# Altium PCB LTC68xx.PcbDoc
Units mm, origin at the board's own origin, x right, y up, seen from the top; angles counter-clockwise.
Board outline 50 x 50 mm, 2 copper layers (Top Layer, Bottom Layer); 46 components, 57 nets, 160 pads, 12 vias.
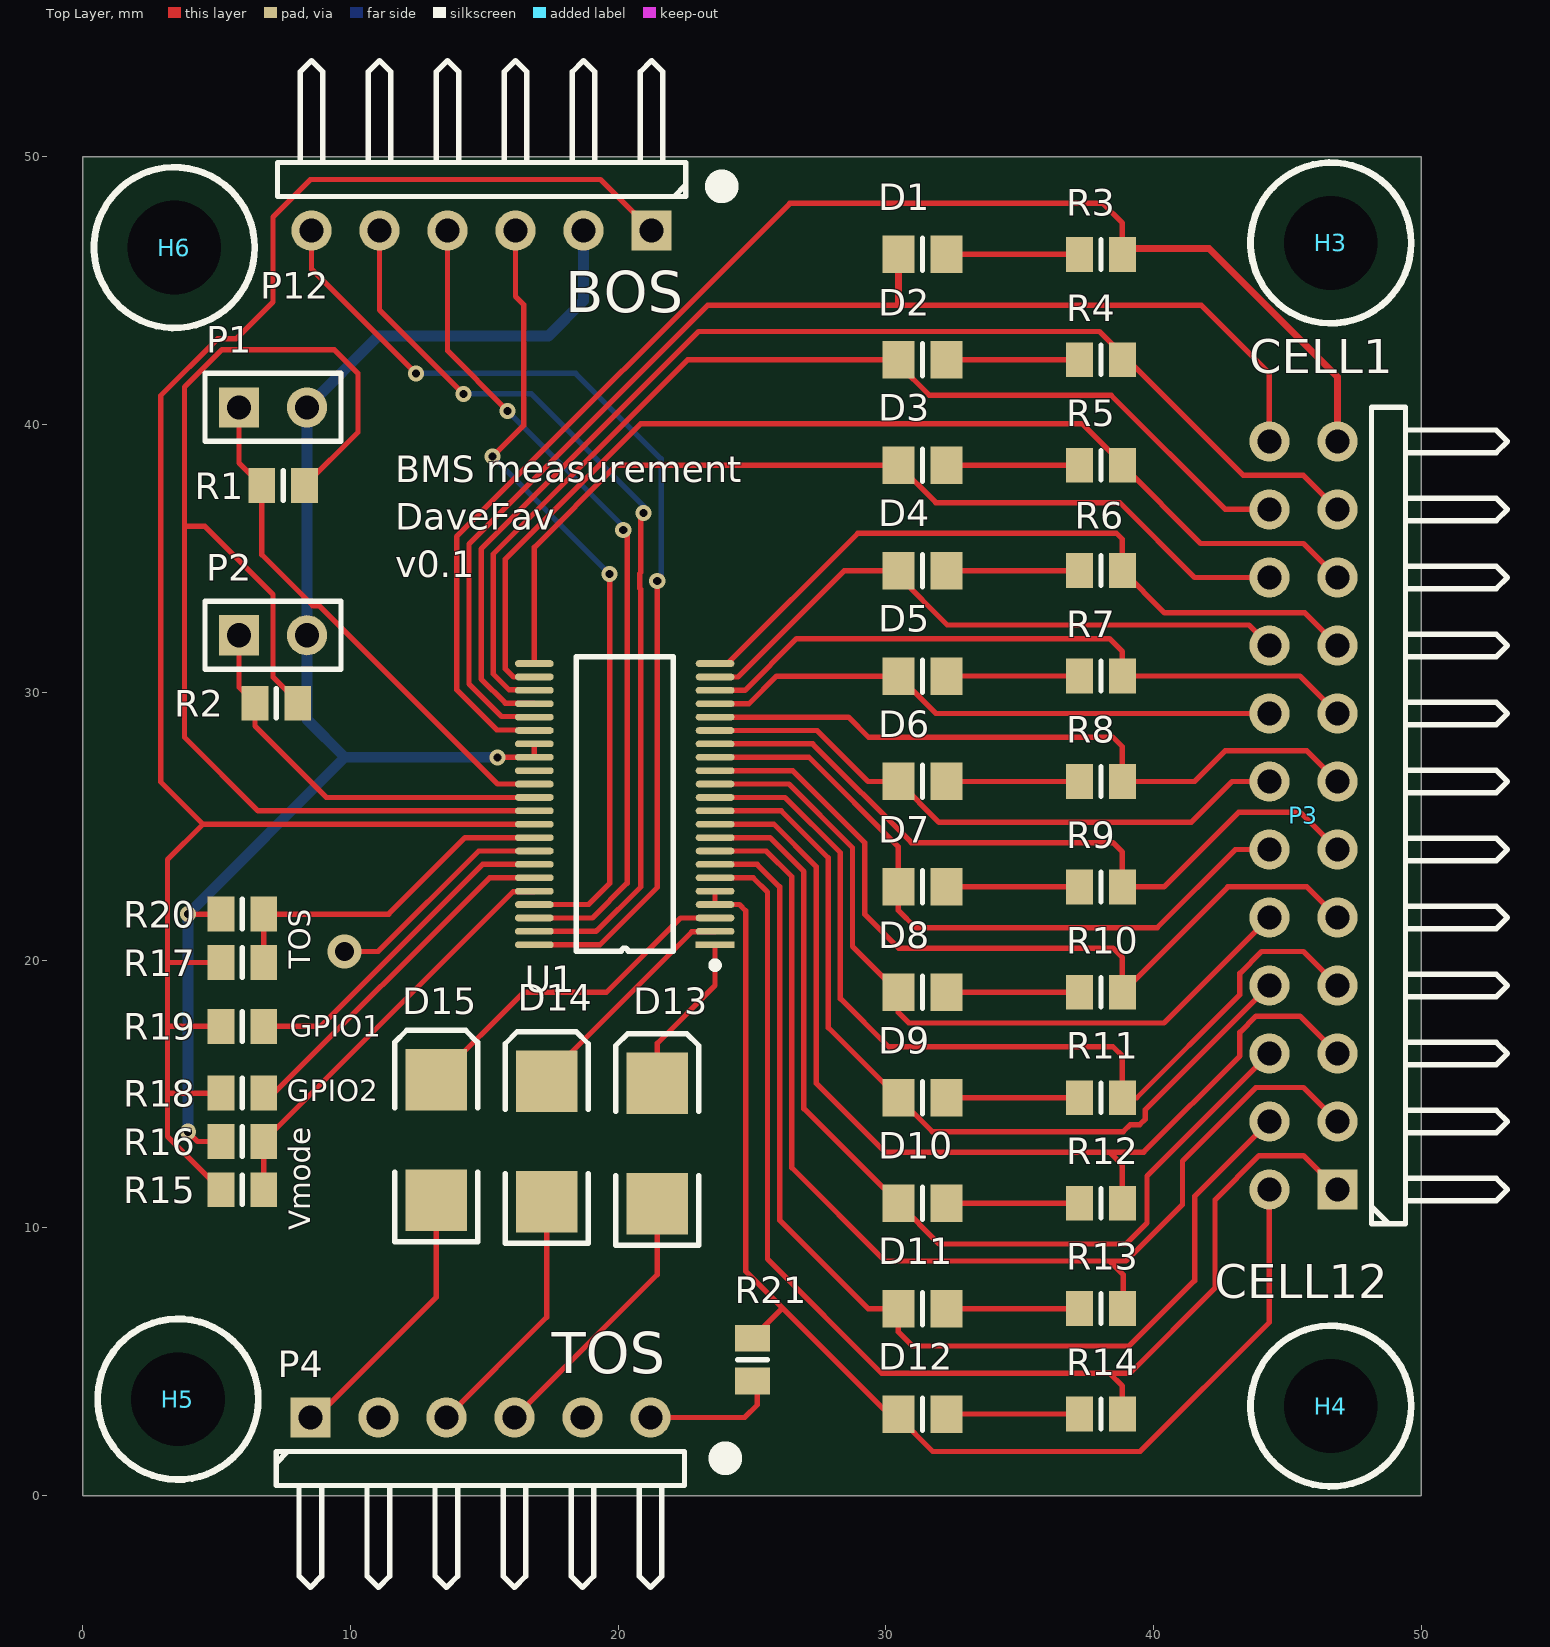
[diagram p0: Top Layer view]
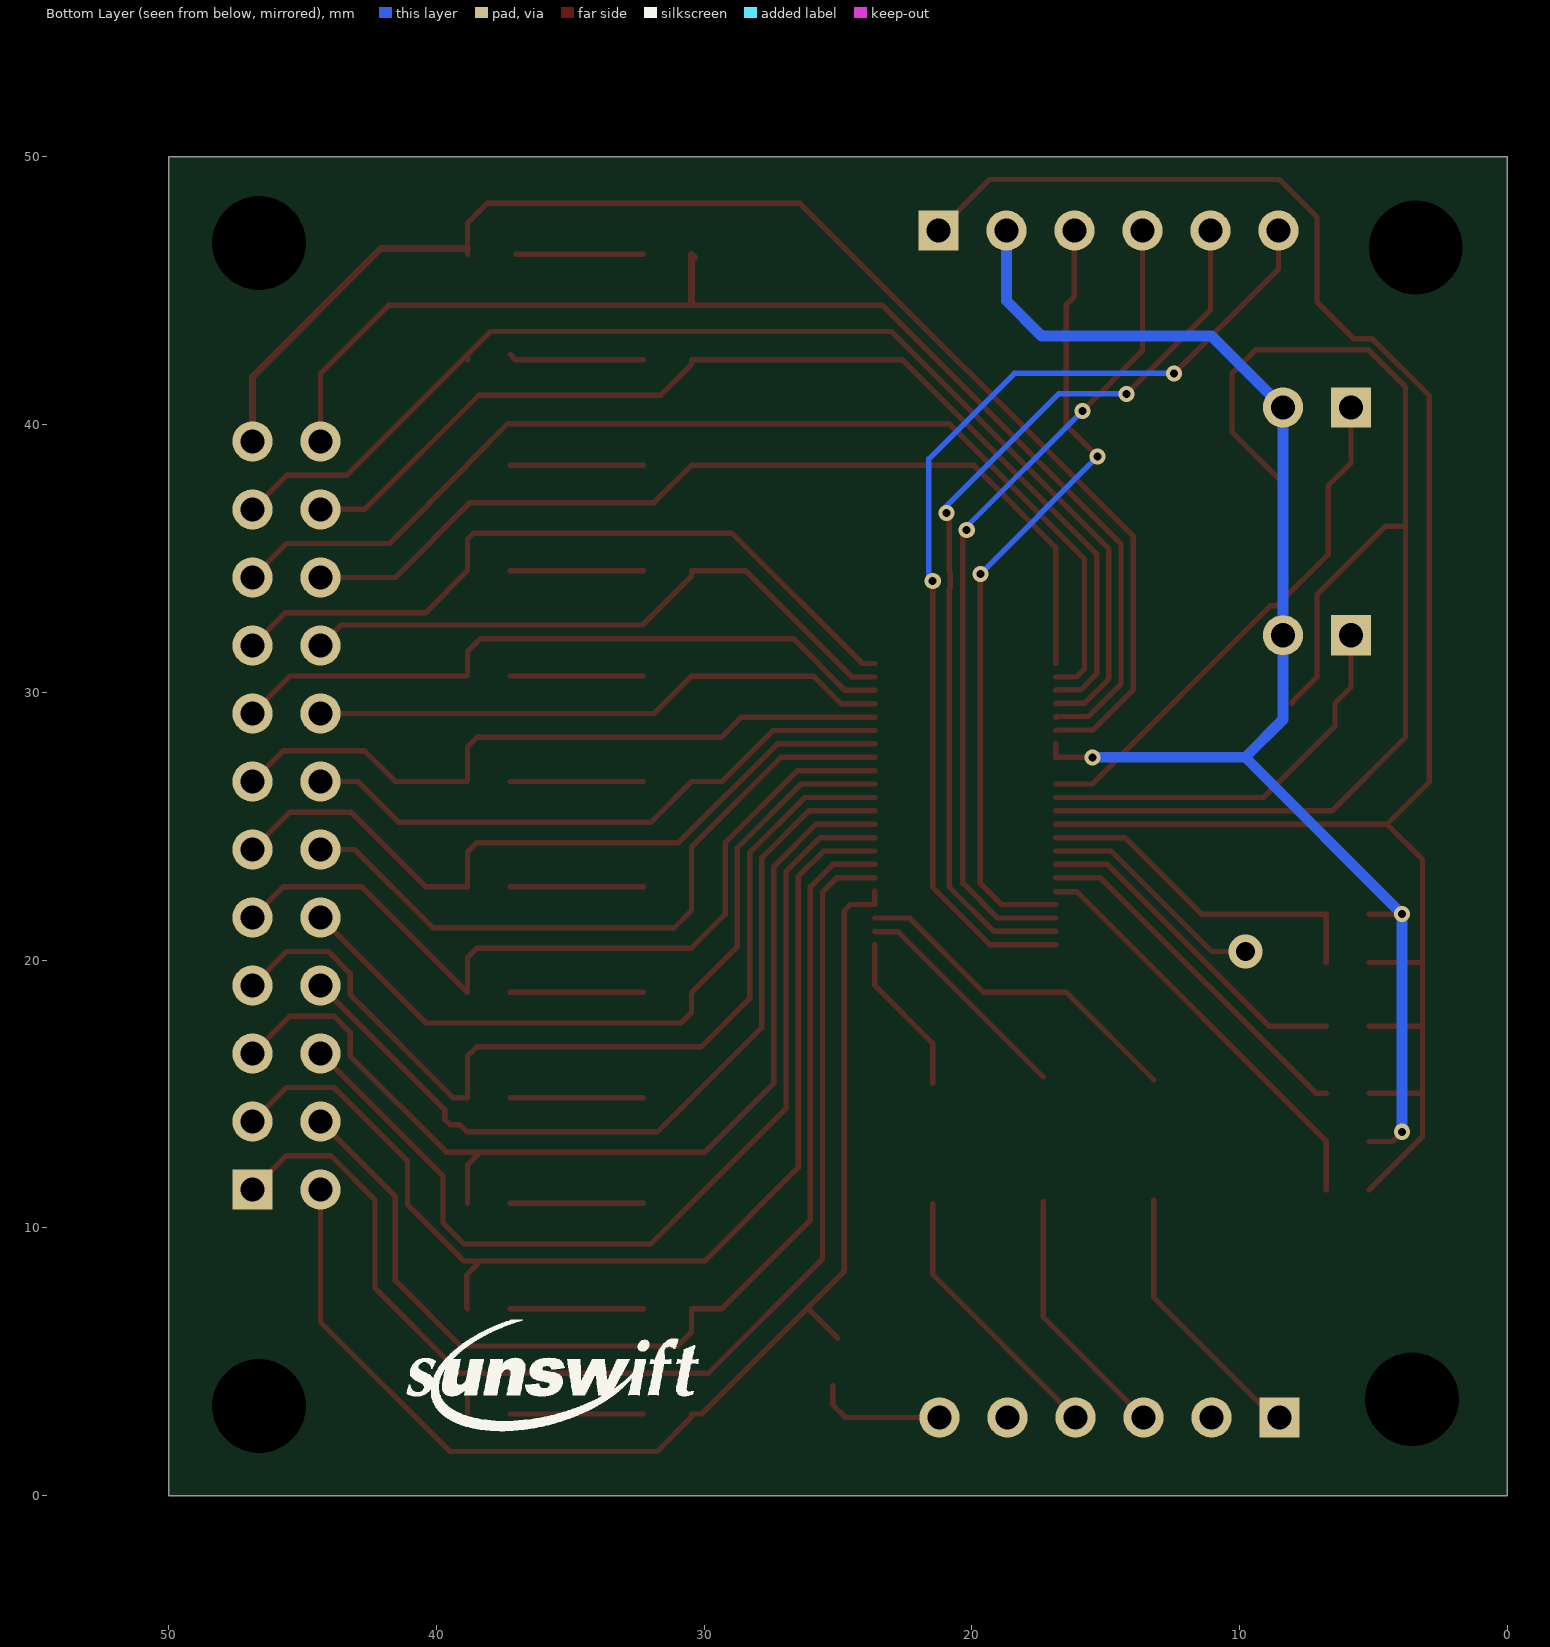
[diagram p1: Bottom Layer view, seen from below]

## Layer stack, top to bottom
Top Layer: signal copper 0.0356
Dielectric: dielectric 0.32, FR-4, Dk 4.8
Bottom Layer: signal copper 0.0356

## Board outline
0,0 50,0 50,50 0,50

## Design rules (kind name [scope] priority, off if disabled: settings)
Clearance [All] p1: gap=0.2
MinimumSolderMaskSliver [All] p1: minsoldermaskwidth=0.01
PolygonConnect [All] p1: connectstyle=Relief reliefconductorwidth=0.254 reliefentries=4 polygonreliefangle="90 Angle"
RoomDefinition LTC6803-3 [InComponentClass('LTC6803-3')] p1: confinementstyle=ConfineIn formatcopy=TRUE lockcomponents=FALSE outline 58.039,55.245 -6.096,55.245 -6.096,-5.461 58.039,-5.461
RoutingVias [All] p1: holewidth=0.711 width=1.27 viastyle="Through Hole" minholewidth=0.2 minwidth=0.4 maxholewidth=0.3 maxwidth=0.6
SilkscreenOverComponentPads [All] p1: minsilkscreentomaskgap=0.01
SolderMaskExpansion [All] p1: expansion=0.102
Width [All] p1: maxlimit=1 minlimit=0.2 preferedwidth=0.2
26 further rules are at their usual default settings.

## Classes and differential pairs
component class LTC6803-3: D1 D2 D3 D4 D5 D6 D7 D8 D9 D10 D11 D12 D13 D14 D15 P1 P2 P3 P4 P12 R1 R2 R3 R4 R5 R6 R7 R8 R9 R10 R11 R12 R13 R14 R15 R16 R17 R18 R19 R20 R21 U1
net class C_[12..0]: C_0 C_1 C_2 C_3 C_4 C_5 C_6 C_7 C_8 C_9 C_10 C_11 C_12
net class S_[12..1]: S_1 S_2 S_3 S_4 S_5 S_6 S_7 S_8 S_9 S_10 S_11 S_12

## Components (designator, comment, footprint, x,y, rotation, side; value= is the part's Value field where it differs from the comment)
D1 "LED2" 6-0805_N 31.369,46.355 r0 top
D2 "LED2" 6-0805_N 31.369,42.418 r0 top
D3 "LED2" 6-0805_N 31.369,38.481 r0 top
D4 "LED2" 6-0805_N 31.369,34.544 r0 top
D5 "LED2" 6-0805_N 31.369,30.607 r0 top
D6 "LED2" 6-0805_N 31.369,26.67 r0 top
D7 "LED2" 6-0805_N 31.369,22.733 r0 top
D8 "LED2" 6-0805_N 31.369,18.796 r0 top
D9 "LED2" 6-0805_N 31.369,14.859 r0 top
D10 "LED2" 6-0805_N 31.369,10.922 r0 top
D11 "LED2" 6-0805_N 31.369,6.985 r0 top
D12 "LED2" 6-0805_N 31.369,3.048 r0 top
D13 "D Schottky" SMB 21.463,13.154 r90 top
D14 "D Schottky" SMB 17.335,13.227 r90 top
D15 "D Schottky" SMB 13.208,13.281 r90 top
H3 "HOLE" M2.5 46.618,46.781 r0 top
H4 "HOLE" M2.5 46.618,3.347 r0 top (schematic designator H3)
H5 "HOLE" M2.5 3.565,3.601 r0 top (schematic designator H3)
H6 "HOLE" M2.5 3.429,46.609 r0 top (schematic designator H3)
P1 "Header 2" HDR1X2 5.842,40.64 r0 top
P2 "Header 2" HDR1X2 5.842,32.131 r0 top
P3 "Header 12X2H" HDR2X12H 46.863,11.43 r90 top
P4 "Header 6H" HDR1X6H 8.509,2.921 r0 top
P12 "Header 6H" HDR1X6H 21.251,47.244 r180 top
R1 "Res Semi" 6-0805_L 7.493,37.719 r0 top
R2 "Res Semi" 6-0805_L 7.239,29.591 r0 top
R3 "Res Semi" 6-0805_L 38.034,46.355 r0 top
R4 "Res Semi" 6-0805_L 38.034,42.418 r0 top
R5 "Res Semi" 6-0805_L 38.034,38.481 r0 top
R6 "Res Semi" 6-0805_L 38.034,34.544 r0 top
R7 "Res Semi" 6-0805_L 38.034,30.607 r0 top
R8 "Res Semi" 6-0805_L 38.034,26.67 r0 top
R9 "Res Semi" 6-0805_L 38.034,22.733 r0 top
R10 "Res Semi" 6-0805_L 38.034,18.796 r0 top
R11 "Res Semi" 6-0805_L 38.034,14.859 r0 top
R12 "Res Semi" 6-0805_L 38.034,10.922 r0 top
R13 "Res Semi" 6-0805_L 38.034,6.985 r0 top
R14 "Res Semi" 6-0805_L 38.034,3.048 r0 top
R15 "Res Semi" 6-0805_L 5.969,11.422 r180 top
R16 "Res Semi" 6-0805_L 5.969,13.227 r0 top
R17 "Res Semi" 6-0805_L 5.969,19.912 r180 top
R18 "Res Semi" 6-0805_L 5.969,15.032 r180 top
R19 "Res Semi" 6-0805_L 5.969,17.526 r180 top
R20 "Res Semi" 6-0805_L 5.969,21.717 r0 top
R21 "Res Semi" 6-0805_L 25.019,5.08 r90 top
U1 "LTC6803-3" SOP44 23.622,20.574 r180 top

## Footprints (in the part's own frame and the unit in brackets; to place one, negate y for a bottom-side part, rotate by r counter-clockwise, add the part's x,y. Pads: shape width x height; smd on the part's side, far side on the other; paste and mask are expansions set on the pad)
6-0805_L [mm] "Chip Resistor, Body 2.0x1.2mm, IPC High Density"
  rect 1x1.3 smd: 1(-0.8,0) 2(0.8,0)
  silkscreen extent 0,-0.55 0,0.55, body extent -1.07,-0.7 1.07,0.7, height 0.7
6-0805_N [mm] "Chip Resistor, Body 2.0x1.2mm, IPC Medium Density"
  rect 1.2x1.4 smd: 1(-0.9,0) 2(0.9,0)
  silkscreen extent 0,-0.6 0,0.6, body extent -1.07,-0.7 1.07,0.7, height 0.7
HDR1X2 [mm] "Connector; Header; 2 Position"
  rect 1.5x1.5 hole 0.9: 1(0,0)
  round 1.5 hole 0.9: 2(2.54,0)
  silkscreen extent -1.27,-1.27 3.81,1.27
HDR1X6H [mm] "Connector; Header; 6 Position; Right Angle"
  rect 1.5x1.5 hole 0.9: 1(0,0)
  round 1.5 hole 0.9: 2(2.54,0) 3(5.08,0) 4(7.62,0) 5(10.16,0) 6(12.7,0)
  silkscreen extent -1.27,-6.35 13.97,-1.27
HDR2X12H [mm] "Connector; Header; 12x2 Position; Right Angle"
  rect 1.5x1.5 hole 0.9: 1(0,0)
  round 1.5 hole 0.9: 2(0,2.54) 3(2.54,0) 4(2.54,2.54) 5(5.08,0) 6(5.08,2.54) 7(7.62,0) 8(7.62,2.54) 9(10.16,0) 10(10.16,2.54) 11(12.7,0) 12(12.7,2.54) 13(15.24,0) 14(15.24,2.54) 15(17.78,0) 16(17.78,2.54) 17(20.32,0) 18(20.32,2.54) 19(22.86,0) 20(22.86,2.54) 21(25.4,0) 22(25.4,2.54) 23(27.94,0) 24(27.94,2.54)
  silkscreen extent -1.27,-6.35 29.21,-1.27
M2.5 [mm]
  round 0 hole 3.5: 1(0,0)
  silkscreen extent -3,-3 3,3
SMB [mm] "DO-214-AA/SMB; 2 C-Bend Leads; Body 5.3 x 3.6 mm, inc. leads (LxW)"
  rect 2.3x2.3 smd: 1(-2.25,0) 2(2.25,0)
  silkscreen extent -3.8,-1.55 4.1,1.55
SOP44 [mm]
  rect 1.45x0.25 smd: 1(0,0)
  oval 1.45x0.25 smd: 2(0,-0.5) 3(0,-1) 4(0,-1.5) 5(0,-2) 6(0,-2.5) 7(0,-3) 8(0,-3.5) 9(0,-4) 10(0,-4.5) 11(0,-5) 12(0,-5.5) 13(0,-6) 14(0,-6.5) 15(0,-7) 16(0,-7.5) 17(0,-8) 18(0,-8.5) 19(0,-9) 20(0,-9.5) 21(0,-10) 22(0,-10.5) 23(6.75,-10.5) 24(6.75,-10) 25(6.75,-9.5) 26(6.75,-9) 27(6.75,-8.5) 28(6.75,-8) 29(6.75,-7.5) 30(6.75,-7) 31(6.75,-6.5) 32(6.75,-6) 33(6.75,-5.5) 34(6.75,-5) 35(6.75,-4.5) 36(6.75,-4) 37(6.75,-3.5) 38(6.75,-3) 39(6.75,-2.5) 40(6.75,-2) 41(6.75,-1.5) 42(6.75,-1) 43(6.75,-0.5) 44(6.75,0)
  silkscreen extent 1.56,-10.75 5.19,0.25

## Part data
D1 D2 D3 D4 D5 D6 D7 D8 D9 D10 D11 D12: "Typical RED, GREEN, YELLOW, AMBER GaAs LED"
D13 D14 D15: "Schottky Diode"
H3 H4 H5 H6: "Hole"
P1 P2: "Header, 2-Pin"
P3: "Header, 12-Pin, Dual row, Right Angle"
P4 P12: "Header, 6-Pin, Right Angle"
R1 R2 R3 R4 R5 R6 R7 R8 R9 R10 R11 R12 R13 R14 R15 R16 R17 R18 R19 R20 R21: "Semiconductor Resistor"

## Via types
v1: diameter 0.6, hole 0.3, Top Layer to Bottom Layer, 11 vias
v2: diameter 1.27, hole 0.711, Top Layer to Bottom Layer, 1 vias

## Nets (pads, with @x,y where several pads share a name; then routed paths per layer and width w, separated by ;. In a path a pad name is that pad's centre, name@x,y a point inside that pad or via, vN(x,y) a via of type N, cw(c..) or ccw(c..) an arc to the next point about the centre after c; other vN are vias at no path point)
C_0: P1.2 P2.2 P12.2 R16.1 R20.1 U1.29 U1.30 | length 54.9
  Top Layer w0.2: v1(3.937,13.589) 4.299,13.227 R16.1 ; v1(3.937,21.717) R20.1 ; v1(15.494,27.559) 15.509,27.574 U1.30 U1.29
  Bottom Layer w0.4: v1(3.937,13.589) v1(3.937,21.717) 9.794,27.574 ; v1(15.494,27.559) 15.479,27.574 9.794,27.574 ; P12.2 18.711,44.619 17.399,43.307 11.049,43.307 P1.2 P2.2 8.382,28.986 9.794,27.574
C_1: D1.1 P3.24 U1.27 | length 47.4
  Top Layer w0.2: U1.27 16.851,29.095 15.647,29.095 14.431,30.311 14.431,35.541 23.34,44.45 41.783,44.45 44.323,41.91 P3.24
  Top Layer w0.254: D1.1@30.353,46.239 D1.1 30.469,44.461
C_2: D2.1 P3.22 U1.25 | length 40.7
  Top Layer w0.2: U1.25 16.851,30.095 15.932,30.095 15.339,30.688 15.339,35.165 22.592,42.418 D2.1 30.469,42.248 31.623,41.094 38.415,41.094 42.679,36.83 P3.22
C_3: D3.1 P3.20 U1.23 | length 34.8
  Top Layer w0.2: U1.23 16.872,35.414 19.939,38.481 D3.1 31.865,37.084 38.735,37.084 41.529,34.29 P3.20
C_4: D4.1 P3.18 U1.21 | length 23.6
  Top Layer w0.2: U1.21 24.478,30.574 28.448,34.544 D4.1 30.469,34.336 32.293,32.512 43.561,32.512 P3.18
C_5: D5.1 P3.16 U1.19 | length 21.7
  Top Layer w0.2: U1.19 24.882,29.574 25.914,30.606 D5.1 31.865,29.21 P3.16
C_6: D6.1 P3.14 U1.17 | length 22.8
  Top Layer w0.2: U1.17 27.433,28.574 29.338,26.669 D6.1 31.992,25.146 41.402,25.146 42.926,26.67 P3.14
C_7: D7.1 P3.12 U1.15 | length 25.9
  Top Layer w0.2: U1.15 27.122,27.574 30.469,24.227 D7.1 30.469,21.855 31.115,21.209 40.132,21.209 43.053,24.13 P3.12
C_8: D8.1 P3.10 U1.13 | length 28.6
  Top Layer w0.2: U1.13 26.378,26.574 28.756,24.196 28.756,20.509 D8.1 30.469,18.045 30.861,17.653 40.386,17.653 P3.10
C_9: D9.1 P3.8 U1.11 | length 31.8
  Top Layer w0.2: U1.11 26.094,25.574 27.848,23.82 27.848,17.48 D9.1 31.738,13.589 38.862,13.589 39.128,13.855 39.481,13.855 39.688,14.062 39.688,14.415 P3.8
C_10: D10.1 P3.6 U1.9 | length 36.1
  Top Layer w0.2: U1.9 25.673,24.574 26.94,23.307 26.94,14.451 D10.1 31.992,9.398 38.961,9.398 39.751,10.188 39.751,11.938 P3.6
C_11: D11.1 P3.4 U1.7 | length 41.3
  Top Layer w0.2: U1.7 25.191,23.574 26.032,22.733 26.032,10.29 29.337,6.985 D11.1 30.469,6.11 30.991,5.588 39.088,5.588 41.529,8.029 41.529,11.176 P3.4
C_12: D12.1 P3.2 R21.2 U1.4 U1.5 | length 46.1
  Top Layer w0.2: U1.5 U1.4 24.535,22.074 24.765,21.844 24.765,8.382 30.099,3.048 D12.1 30.469,2.932 31.75,1.651 39.497,1.651 44.323,6.477 P3.2 ; R21.2 26.124,6.985
CSBI: P12.6 U1.44 | length 39
  Top Layer w0.2: P12.6 8.551,45.805 v1(12.446,41.91) ; U1.44 19.325,20.574 21.463,22.712 v1(21.463,34.163)
  Bottom Layer w0.2: v1(12.446,41.91) 18.415,41.91 21.609,38.716 21.609,34.309 v1(21.463,34.163)
CSBO: D15.2 U1.3 | length 12.9
  Top Layer w0.2: D15.2 16.473,18.796 19.558,18.796 22.336,21.574 U1.3
GPIO1: R19.1 U1.38 | length 12.6
  Top Layer w0.2: R19.1 8.89,17.526 14.938,23.574 U1.38
GPIO2: R18.1 U1.39 | length 13.4
  Top Layer w0.2: R18.1 7.158,15.032 15.2,23.074 U1.39
NetD1_2: D1.2 R3.1 | length 4.7
  Top Layer w0.2: D1.2 R3.1@37.018,46.355
NetD2_2: D2.2 R4.1 | length 5
  Top Layer w0.2: D2.2 37.038,42.418 R4.1@37.234,42.614
NetD3_2: D3.2 R5.1 | length 5
  Top Layer w0.2: D3.2 R5.1
NetD4_2: D4.2 R6.1 | length 5
  Top Layer w0.2: D4.2 R6.1
NetD5_2: D5.2 R7.1 | length 5
  Top Layer w0.2: D5.2 R7.1
NetD6_2: D6.2 R8.1 | length 5
  Top Layer w0.2: D6.2 R8.1
NetD7_2: D7.2 R9.1 | length 5
  Top Layer w0.2: D7.2 R9.1
NetD8_2: D8.2 R10.1 | length 5
  Top Layer w0.2: D8.2 R10.1
NetD9_2: D9.2 R11.1 | length 5
  Top Layer w0.2: D9.2 R11.1
NetD10_2: D10.2 R12.1 | length 5
  Top Layer w0.2: D10.2 R12.1
NetD11_2: D11.2 R13.1 | length 5
  Top Layer w0.2: D11.2 R13.1
NetD12_2: D12.2 R14.1 | length 5
  Top Layer w0.2: D12.2 R14.1
NetD13_1: D13.1 P4.4 | length 10.2
  Top Layer w0.2: P4.4 21.463,8.255 D13.1
NetD14_1: D14.1 P4.3 | length 9.6
  Top Layer w0.2: P4.3 17.335,6.667 D14.1
NetD15_1: D15.1 P4.1 | length 10
  Top Layer w0.2: P4.1@8.727,2.921 13.208,7.402 D15.1
NetP4_6: P4.6 R21.1 | length 4.9
  Top Layer w0.2: P4.6 24.727,2.921 25.2,3.394 R21.1@25.2,4.099
S_1: P3.23 R3.2 U1.28 | length 53.2
  Top Layer w0.2: U1.28 16.851,28.595 15.474,28.595 13.97,30.099 13.97,35.814 26.416,48.26 38.1,48.26 38.834,47.526 38.834,46.571 R3.2
  Top Layer w0.254: R3.2@38.834,46.571 42.075,46.571 46.863,41.783 P3.23
S_2: P3.21 R4.2 U1.26 | length 45.5
  Top Layer w0.2: U1.26 16.851,29.595 15.789,29.595 14.885,30.499 14.885,35.353 23.004,43.472 37.976,43.472 R4.2@38.834,42.614 ; R4.2 R4.2@38.834,42.614 ; P3.21 45.593,38.1 43.348,38.1 R4.2@38.834,42.614
S_3: P3.19 R5.2 U1.24 | length 40.9
  Top Layer w0.2: U1.24 16.095,30.574 15.793,30.876 15.793,34.977 20.849,40.033 37.333,40.033 38.834,38.532 R5.2 41.755,35.56 45.593,35.56 P3.19
S_4: P3.17 R6.2 U1.22 | length 27.7
  Top Layer w0.2: U1.22 24.089,31.074 28.956,35.941 38.608,35.941 38.834,35.715 R6.2 40.412,32.966 45.647,32.966 P3.17
S_5: P3.15 R7.2 U1.20 | length 25.7
  Top Layer w0.2: U1.20 24.74,30.074 26.67,32.004 38.354,32.004 38.834,31.524 R7.2 45.466,30.607 P3.15
S_6: P3.13 R8.2 U1.18 | length 25.9
  Top Layer w0.2: U1.18 28.598,29.074 29.351,28.321 38.481,28.321 38.834,27.968 R8.2 41.529,26.67 42.672,27.813 45.72,27.813 P3.13
S_7: P3.11 R9.2 U1.16 | length 27.9
  Top Layer w0.2: U1.16 27.264,28.074 30.954,24.384 38.481,24.384 38.834,24.031 R9.2 40.386,22.733 43.18,25.527 45.466,25.527 P3.11
S_8: P3.9 R10.2 U1.14 | length 31.1
  Top Layer w0.2: U1.14 26.52,27.074 29.21,24.384 29.21,21.717 30.48,20.447 38.481,20.447 38.834,20.094 R10.2 42.771,22.733 45.72,22.733 P3.9
S_9: P3.7 R11.2 U1.12 | length 35.2
  Top Layer w0.2: U1.12 26.236,26.074 28.302,24.008 28.302,18.561 30.099,16.764 38.481,16.764 38.834,16.411 R11.2 39.37,14.859 43.219,18.708 43.219,19.507 44.032,20.32 45.593,20.32 P3.7
S_10: P3.5 R12.2 U1.10 | length 38.4
  Top Layer w0.2: U1.10 25.815,25.074 27.394,23.495 27.394,15.405 29.972,12.827 38.354,12.827 ; R12.2 38.834,12.347 38.354,12.827 ; P3.5 45.466,17.907 43.822,17.907 43.219,17.304 43.219,16.422 39.624,12.827 38.354,12.827
S_11: P3.3 R13.2 U1.8 | length 42.1
  Top Layer w0.2: U1.8 25.531,24.074 26.486,23.119 26.486,12.249 29.972,8.763 38.354,8.763 ; R13.2 38.862,7.013 38.862,8.255 38.354,8.763 ; P3.3 45.593,15.24 43.815,15.24 41.075,12.5 41.075,10.87 38.968,8.763 38.354,8.763
S_12: P3.1 R14.2 U1.6 | length 46.8
  Top Layer w0.2: U1.6 25.049,23.074 25.578,22.545 25.578,8.839 29.845,4.572 38.354,4.572 ; R14.2 38.834,4.092 38.354,4.572 ; P3.1@46.863,11.077 P3.1 45.593,12.7 43.942,12.7 42.291,11.049 42.291,7.747 39.116,4.572 38.354,4.572
SCKI: P12.3 U1.41 | length 29.9
  Top Layer w0.2: v1(15.303,38.798) 16.475,39.97 16.475,44.485 16.171,44.789 P12.3 ; U1.41 18.899,22.074 19.685,22.86 v1(19.685,34.417)
  Bottom Layer w0.2: v1(15.303,38.798) v1(19.685,34.417)
SCKO: D13.2 U1.1 | length 6.1
  Top Layer w0.2: D13.2 21.463,16.891 23.622,19.05 U1.1
SDI: P12.4 U1.42 | length 31.2
  Top Layer w0.2: P12.4 13.631,42.757 v1(15.875,40.513) ; U1.42 19.041,21.574 20.339,22.872 20.339,35.922 v1(20.193,36.068)
  Bottom Layer w0.2: v1(15.875,40.513) 20.193,36.195 v1(20.193,36.068)
SDO: P12.5 U1.43 | length 34.8
  Top Layer w0.2: P12.5 11.091,44.281 v1(14.224,41.148) ; U1.43 19.169,21.074 19.215,21.12 19.229,21.12 20.847,22.738 20.847,33.854 20.809,33.892 20.809,34.434 20.847,34.472 20.847,36.595 v1(20.955,36.703)
  Bottom Layer w0.2: v1(14.224,41.148) 16.764,41.148 20.955,36.957 v1(20.955,36.703)
SDOI: D14.2 U1.2 | length 8.5
  Top Layer w0.2: D14.2@17.335,15.638 22.75,21.053 23.601,21.053 U1.2
TOS: R17.1 R20.2 U1.36 | length 13.1
  Top Layer w0.2: R17.1 R20.2 11.43,21.717 14.287,24.574 U1.36
VMODE: R15.1 R16.2 U1.40 | length 15.8
  Top Layer w0.2: R15.1 R16.2 6.769,13.248 16.074,22.553 16.851,22.553 U1.40
VREF: R1.2 R2.2 U1.34 | length 48.5
  Top Layer w0.2: R2.2 8.039,29.642 7.112,30.569 7.112,33.655 4.572,36.195 3.81,36.195 ; R1.2 10.287,39.713 10.287,41.91 9.398,42.799 5.207,42.799 3.81,41.402 3.81,36.195 ; U1.34 6.557,25.574 3.81,28.321 3.81,36.195
VREG: P12.1 R15.2 R17.2 R18.2 R19.2 U1.35 | length 74.3
  Top Layer w0.2: 3.202,19.912 R17.2 ; 3.221,15.032 R18.2 ; R15.2 3.175,13.416 3.175,17.526 ; R19.2 3.175,17.526 ; U1.35 4.5,25.074 ; P12.1 19.346,49.149 8.509,49.149 7.112,47.752 7.112,44.577 5.734,43.199 5.041,43.199 2.921,41.079 2.921,26.653 4.5,25.074 ; 3.175,17.526 3.175,23.749 4.5,25.074
VTEMP1: P2.1 R2.1 U1.33 | length 15.2
  Top Layer w0.2: P2.1 5.842,30.188 R2.1 6.439,28.74 9.105,26.074 U1.33
VTEMP2: P1.1 R1.1 U1.32 | length 19.6
  Top Layer w0.2: P1.1 5.842,38.57 R1.1 6.693,35.141 8.599,33.235 8.839,33.235 15.5,26.574 U1.32
WDTB: U1.37 | length 8.6
  Top Layer w0.2: v2(9.779,20.32) 11.042,20.32 14.796,24.074 U1.37
pads on no net: H3.1 H4.1 H5.1 H6.1 P4.2 P4.5 U1.31

## Silkscreen, mask and mechanical layers (free items; w line width, h text height)
Top Overlay:
  circle w1: c24.003,1.397 r0.127
  circle w1: c23.876,48.895 r0.127
  circle w0.254: c23.622,19.812 r0.127
  text "BOS" at 18.034,44.196 h1.52
  text "BMS measurement" at 11.684,37.846 h1
  text "DaveFav" at 11.684,36.068 h1
  text "v0.1" at 11.684,34.29 h1
  text "TOS" at 8.509,19.685 h0.8 r90
  text "GPIO1" at 7.747,17.145 h0.8
  text "GPIO2" at 7.62,14.732 h0.8
  text "Vmode" at 8.509,9.906 h0.8 r90
  text "TOS" at 17.526,4.572 h1.52
Bottom Overlay:
  drawing of 1659 lines, arcs and shapes, not listed
Mechanical 1:
  the board outline again, w0.2

## Text inside footprints (layer, text, board x,y; h text height)
P3: Top Overlay "CELL1" at 43.561,41.91 h1.27; Top Overlay "CELL12" at 42.291,7.366 h1.27